# Altium PCB Front-End-Power-Protection.PcbDoc
Units mm, origin at the board's own origin, x right, y up, seen from the top; angles counter-clockwise.
Board outline 73.5 x 29.5 mm, 2 copper layers (Top Layer, Bottom Layer); 20 components, 11 nets, 49 pads, 5 vias.
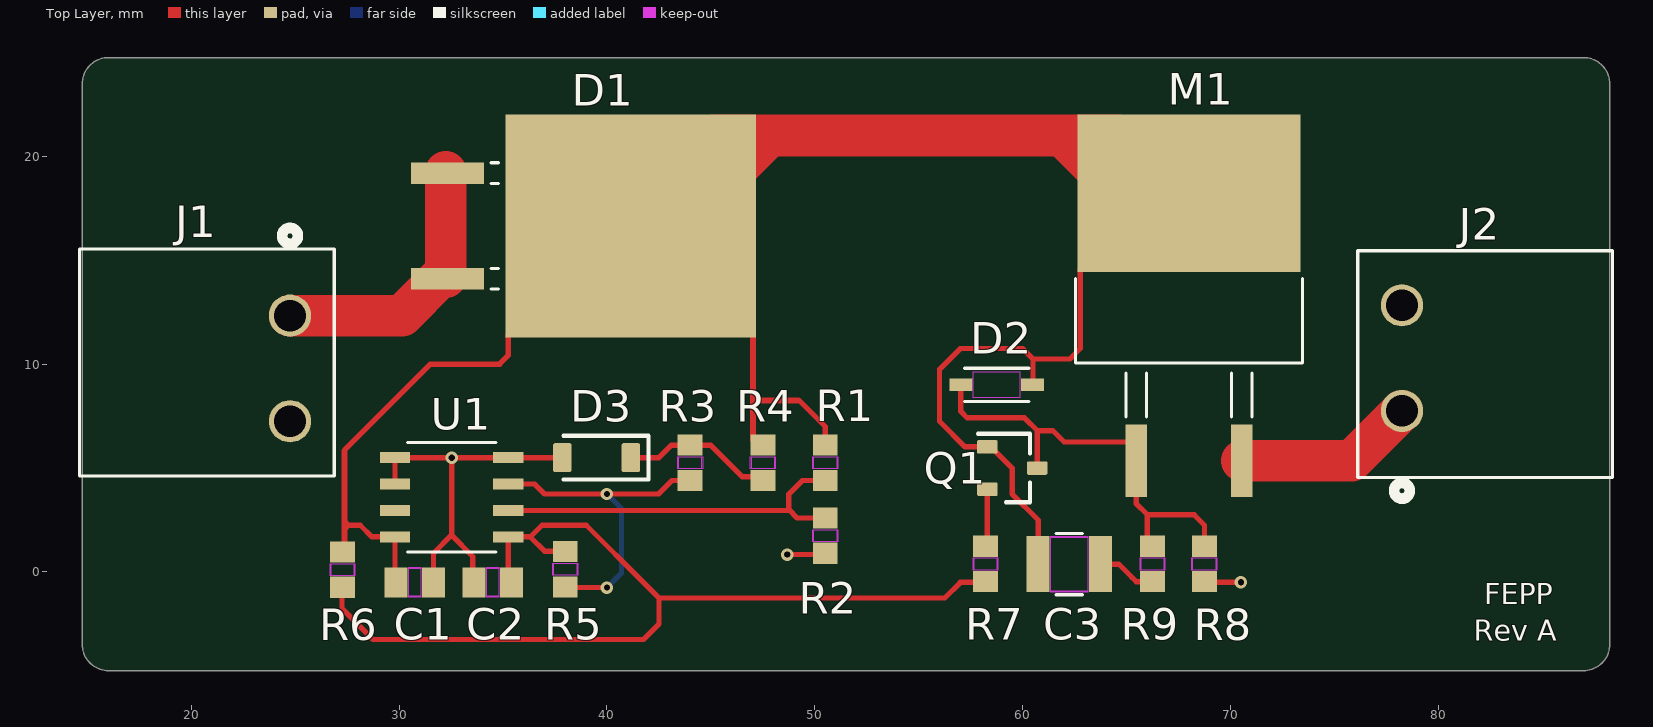
[diagram p0: Top Layer view]
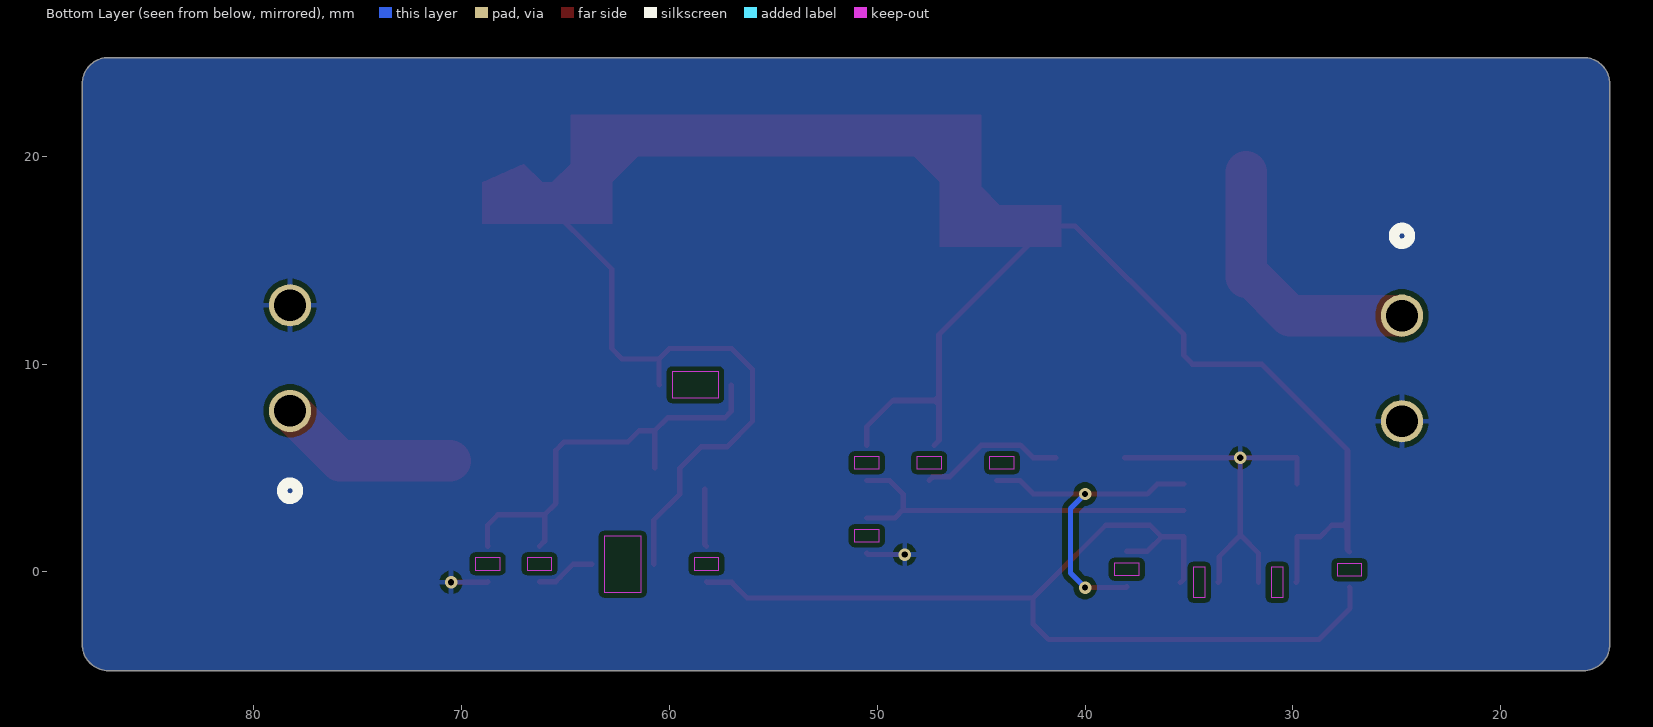
[diagram p1: Bottom Layer view, seen from below]
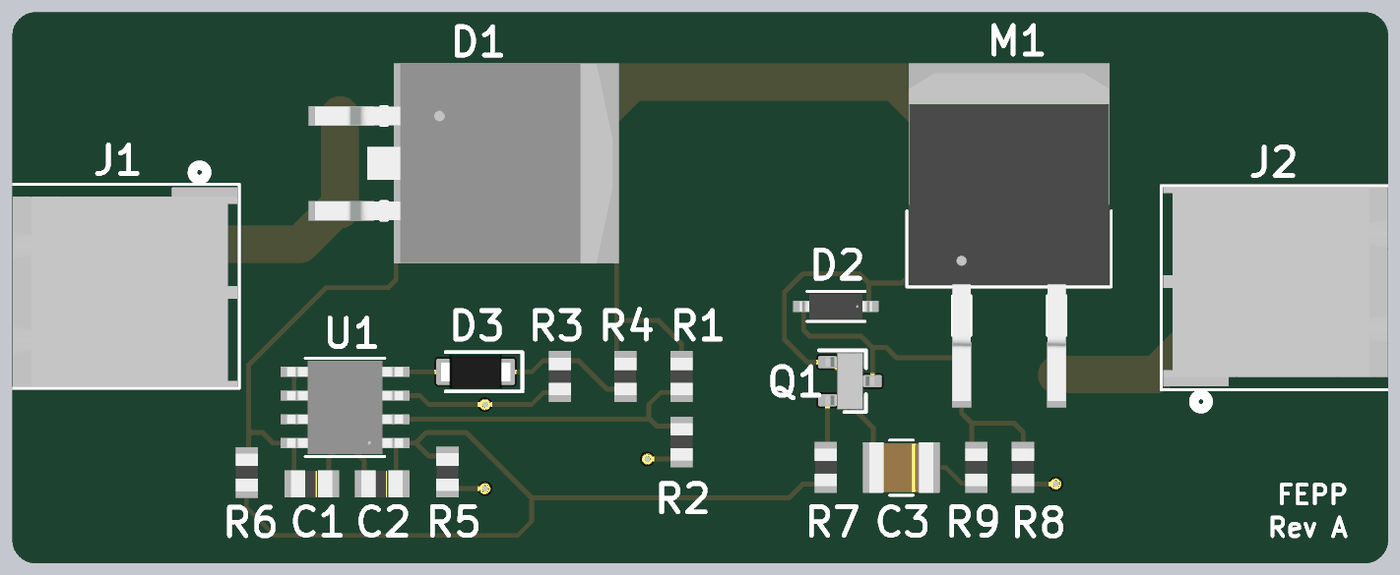
[diagram p2: 3D render of the assembled board from above, using the file's embedded part models]

## Layer stack, top to bottom
Top Solder: solder mask 0.0102, Solder Resist, Dk 3.5
Top Layer: signal copper 0.0356
Dielectric 1: dielectric 0.32, FR-4, Dk 4.8
Bottom Layer: signal copper 0.0356
Bottom Solder: solder mask 0.0102, Solder Resist, Dk 3.5

## Board outline
14.75,-3.48 14.75,23.48 cw(c16.02,23.48) 16.02,24.75 86.98,24.75 cw(c86.98,23.48) 88.25,23.48 88.25,-3.48 cw(c86.98,-3.48) 86.98,-4.75 16.02,-4.75 cw(c16.02,-3.48)

## Design rules (kind name [scope] priority, off if disabled: settings)
Clearance [All] p1: gap=0.254 ignorepadtopadclearanceinfootprint=FALSE except(0: Arc-Hole Track-Hole SMDPad-Hole THPad-Hole Via-Hole Fill-Hole Poly-Hole Region-Hole Text-Hole)
PolygonConnect [All] p1: connectstyle=Relief reliefconductorwidth=0.254 reliefentries=4 polygonreliefangle="90 Angle" airgapwidth=0.254
RoutingVias [All] p1: holewidth=0.3 width=0.6 viastyle="Through Hole" minholewidth=0.3 minwidth=0.6 maxholewidth=0.3 maxwidth=0.6
SolderMaskExpansion [All] p1: expansion=0.102 istentingtop=FALSE
Width "Power path" [InNet('NetD1_1') OR InNet('VIN_PROT') OR InNet('NetJ2_1')] p1: maxlimit=3 minlimit=1.5 preferedwidth=2
Width [All] p2: maxlimit=0.5 minlimit=0.2 preferedwidth=0.254
30 further rules are at their usual default settings.

## Components (designator, comment, footprint, x,y, rotation, side; value= is the part's Value field where it differs from the comment)
C1 "100nF" CAP_X7R_0805_AVX 30.75,-0.5 r180 top
C2 "100pF" CAP_X7R_0805_AVX 34.5,-0.5 r180 top
C3 "4.7uF" CAP_CC1210_YAG 62.24,0.372 r180 top
D1 "MBRB745" D2PAK_VIS 41.139,16.65 r270 top
D2 "MMSZ5245B" SOD123_DIO 58.75,9 r180 top
D3 "MM1Z4733A" SOD-123FL 39.5,5.5 r180 top value=CLD-Diode
J1 "282814-2" CONN2_282814-2 24.75,12.33 r270 top
J2 "282814-2" CONN2_282814-2 78.25,7.75 r90 top
M1 "IRF4905STRLPBF" TRAN_IRF4905STRLPBF_INF 68,15 r0 top
Q1 "MMBT3906" SOT-23 59.5,5 r0 top value=Diode
R1 "22k" RC0805N_YAG 50.5,5.25 r270 top
R2 "13k" RC0805N_YAG 50.5,1.75 r270 top
R3 "10k" RC0805N_YAG 44,5.25 r90 top
R4 "1k" RC0805N_YAG 47.5,5.25 r270 top
R5 "600k" RC0805N_YAG 37.993,0.135 r270 top
R6 "10k" RC0805N_YAG 27.277,0.114 r270 top
R7 "4.7k" RC0805N_YAG 58.211,0.385 r90 top
R8 "36k" RC0805N_YAG 68.741,0.385 r270 top
R9 "10k" RC0805N_YAG 66.246,0.385 r90 top
U1 "LM393D" SO8_STM 32.526,3.595 r180 top

## Footprints (in the part's own frame and the unit in brackets; to place one, negate y for a bottom-side part, rotate by r counter-clockwise, add the part's x,y. Pads: shape width x height; smd on the part's side, far side on the other; paste and mask are expansions set on the pad)
CAP_CC1210_YAG [mil]
  rect 44x106 smd paste+0 mask+0: 1(-59,0) 2(59,0)
  Top Layer keep-out region: -35,-51 -35,51 35,51 35,-51
  Keep-Out Layer region: -35,-53 -35,53 35,53 35,-53
  silkscreen extent -25,-58 25,58, body extent -67,-53 67,53, height 106
CAP_X7R_0805_AVX [mil]
  rect 44x57 smd paste+0 mask+0: 1(-35.5,0) 2(35.5,0)
  Top Layer keep-out region: -11.5,-26.5 -11.5,26.5 11.5,26.5 11.5,-26.5
  Keep-Out Layer region: -11.5,-28.5 -11.5,28.5 11.5,28.5 11.5,-28.5
  body extent -44,-29 44,29, height 37
CONN2_282814-2 [mil]
  round 80 hole 60 paste-40 mask+0: 1(0,0) 2(200,0)
  silkscreen extent -166,-399 303,84, body extent -119,-393 300,79, height 329
D2PAK_VIS [mil]
  rect 41x138 smd paste+0 mask+0: 1(-100,-347) 3(100,-347)
  rect 422x474 smd paste+0 mask+0: 2(0,0)
  silkscreen extent -119,-264 120,-250, body extent -210,-402 210,223, height 190
RC0805N_YAG [mil]
  rect 40x47 smd paste+0 mask+0: 1(-33.5,0) 2(33.5,0)
  Top Layer keep-out region: -11.5,-21.5 -11.5,21.5 11.5,21.5 11.5,-21.5
  Keep-Out Layer region: -11.5,-23.5 -11.5,23.5 11.5,23.5 11.5,-23.5
  body extent -39,-24 39,24, height 28
SO8_STM [mil]
  rect 57.5x21 smd paste+0 mask+0: 1(-107.25,75) 2(-107.25,25) 3(-107.25,-25) 4(-107.25,-75) 5(107.25,-75) 6(107.25,-25) 7(107.25,25) 8(107.25,75)
  silkscreen extent -84,-104 84,104, body extent -122,-99 122,99, height 69
SOD123_DIO [mm]
  rect 1.111x0.601 smd paste+0 mask+0: 1(-1.725,0) 2(1.725,0)
  Keep-Out Layer region: -1.119,-0.624 -1.119,0.624 1.119,0.624 1.119,-0.624
  silkscreen extent -1.55,-0.8 1.55,0.8, body extent -1.92,-0.67 1.92,0.67, height 0.81
SOD-123FL [mm]
  rrect25% 0.9x1.4 smd: A(1.65,0) K(-1.65,0)
  silkscreen extent -2.5,-1.05 1.6,1.05, body extent -1.85,-0.9 1.85,0.9, height 1.3
SOT-23 [mm] "SOT23, 3-Leads, IPC Medium Density, TO-236"
  rrect25% 1x0.65 smd: 1(-1.2,1.02) 2(-1.2,-1.02) 3(1.2,0)
  silkscreen extent -1.65,-1.65 0.85,1.65, body extent -1.3,-1.52 1.3,1.52, height 1.3
TRAN_IRF4905STRLPBF_INF [mil]
  rect 41x138 smd paste+0 mask+0: 1(-100,-380) 2(100,-380)
  rect 422x298 smd paste+0 mask+0: 3(0,127)
  silkscreen extent -215,-297 215,-34, body extent -210,-435 210,255, height 67

## Part data
C1: library part 08053C104KAT2A, "08053C104KAT2A", Manufacturer_Name="KYOCERA AVX", Copyright="Copyright (C) 2026 Ultra Librarian. All rights reserved.", Manufacturer_Part_Number=08053C104KAT2A
C2: library part 08053C104KAT2A, Manufacturer_Name="KYOCERA AVX", Copyright="Copyright (C) 2026 Ultra Librarian. All rights reserved.", Manufacturer_Part_Number=08053C104KAT2A
C3: library part CC1210KKX7R9BB475, "CC1210KKX7R9BB475", Manufacturer_Name=Yageo, Copyright="Copyright (C) 2026 Ultra Librarian. All rights reserved.", Manufacturer_Part_Number=CC1210KKX7R9BB475
D1: "No Description Available", Manufacturer_Name=Vishay, Copyright="Copyright (C) 2026 Ultra Librarian. All rights reserved.", Manufacturer_Part_Number=MBRB745
D2: library part MMSZ5245B-7-F, "MMSZ5245B-7-F", Manufacturer_Name="Diodes Inc", Copyright="Copyright (C) 2026 Ultra Librarian. All rights reserved.", Manufacturer_Part_Number=MMSZ5245B-7-F
J1 J2: "TERMI-BLOK HEADER,ASSY90 2P.5", Manufacturer_Name="TE Connectivity", Copyright="Copyright (C) 2026 Ultra Librarian. All rights reserved.", Datasheet=https://www.te.com/commerce/DocumentDelivery/DDEController?Action=srchrtrv&DocNm=1-1773458-1_EURO_STYLE_QRG&DocType=Data+Sheet&DocLang=English&PartCntxt=282814-2&DocFormat=pdf, Manufacturer_Part_Number=282814-2, RefDes=RefDes, Type=Type
M1: "No Description Available", Manufacturer_Name=Infineon, Copyright="Copyright (C) 2026 Ultra Librarian. All rights reserved.", Datasheet=https://www.infineon.com/dgdl/irf4905spbf.pdf?fileId=5546d462533600a4015355e331c41980, Manufacturer_Part_Number=IRF4905STRLPBF, RefDes=RefDes, Type=Type
R1 R2 R3 R4 R5 R6 R7 R8 R9: library part RC0805FR-0722KL, "RC0805FR-0722KL", Manufacturer_Name=Yageo, Copyright="Copyright (C) 2026 Ultra Librarian. All rights reserved.", Digi-Key_Part_Number_1=311-22.0KCRCT-ND, Digi-Key_Part_Number_2=311-22.0KCRDKR-ND, Digi-Key_Part_Number_3=311-22.0KCRTR-ND, Digi-Key_Part_Number_4=311-22.0KCRTR-NDL, Manufacturer_Part_Number=RC0805FR-0722KL
U1: "Low power dual voltage comparator", Manufacturer_Name=STMicroelectronics, Copyright="Copyright (C) 2025 Ultra Librarian. All rights reserved.", Manufacturer_Part_Number=LM393D, RefDes=RefDes, Type=Type
D3: Datasheet=https://diotec.com/de/produktliste/C.html, ki_description="CLD Current Limiting Diode", ki_keywords="CLD current limiting diode", Reference=D
Q1: Datasheet=https://diotec.com/de/produktliste/D.html, ki_description="Diode with NC pin", ki_keywords="Doide NC pin", Reference=D

## Via types
v1: diameter 0.6, hole 0.3, Top Layer to Bottom Layer, 5 vias

## Nets (pads, with @x,y where several pads share a name; then routed paths per layer and width w, separated by ;. In a path a pad name is that pad's centre, name@x,y a point inside that pad or via, vN(x,y) a via of type N, cw(c..) or ccw(c..) an arc to the next point about the centre after c; other vN are vias at no path point)
GND: C1.1 C2.2 D3.A J1.2 J2.2 R2.2 R8.2 U1.4 U1.5 U1.6 | length 22.3
  Top Layer w0.254: U1.6 U1.5 v1(32.526,5.5) ; C1.1 31.652,0.902 32.526,1.776 v1(32.526,5.5) ; 32.52,1.77 33.544,0.746 33.544,-0.446 C2.2 ; D3.A@38.1,5.5 U1.4 v1(32.526,5.5) ; v1(48.677,0.835) 50.435,0.835 R2.2 ; R8.2 68.776,-0.5 v1(70.5,-0.5)
NetC3_1: C3.1 R9.1 | length 2.9
  Top Layer w0.254: C3.1 64.628,0.372 65.25,-0.25 65.466,-0.466 R9.1
NetD1_1: D1.1 D1.3 J1.1 | length 13.3
  Top Layer w2: J1.1 30.137,12.33 31.977,14.17 32.25,14.17 D1.1@32.25,19.25
NetD2_2: D2.2 M1.1 Q1.3 R8.1 R9.2 | length 21.2
  Top Layer w0.254: D2.2 57.025,7.725 57.335,7.415 60.085,7.415 60.7,6.8 ; Q1.3 60.7,6.8 ; R9.2 66,1.482 66,2.75 ; R8.1 68.75,1.245 68.75,2.25 68.25,2.75 66,2.75 ; 60.7,6.8 61.45,6.8 62,6.25 65.066,6.25 65.46,5.856 M1.1 65.46,3.29 66,2.75
NetD3_K: D3.K R3.2 R4.2 | length 7.1
  Top Layer w0.254: D3.K@41.4,5.5 42.5,5.5 43.101,6.101 R3.2 44.988,6.101 46.512,4.577 47.322,4.577 R4.2
NetJ2_1: J2.1 M1.2 | length 8.7
  Top Layer w2: M1.2 75.839,5.348 78.241,7.75 J2.1
NetQ1_2: Q1.2 R7.2 | length 2.8
  Top Layer w0.254: R7.2 58.3,1.326 Q1.2
NetR1_2: R1.2 R2.1 U1.2 | length 18.2
  Top Layer w0.254: U1.2 48.71,2.96 48.75,3 ; R2.1 49.149,2.601 48.75,3 ; R1.2 49.399,4.399 48.75,3.75 48.75,3
NetR3_1: R3.1 R5.2 U1.3 | length 16.6
  Top Layer w0.254: U1.3 36.52,4.23 37,3.75 42.485,3.75 43.134,4.399 R3.1@44.25,4.399 ; R5.2 38.027,-0.75 v1(40,-0.75)
  Bottom Layer w0.254: v1(40,-0.75) 40.696,-0.054 40.696,3.054 v1(40,3.75)
OUT1: C2.1 R5.1 R6.2 R7.1 U1.1 | length 47.7
  Top Layer w0.254: R6.2 27.25,-0.764 27.25,-1.75 28.75,-3.25 41.75,-3.25 42.5,-2.5 42.5,-1.25 ; C2.1@35.411,-0.51 C2.1 35.25,-0.348 U1.1 36.31,1.69 ; R5.1 37.979,1 37,1 36.31,1.69 ; R7.1 58.176,-0.5 57,-0.5 56.25,-1.25 42.5,-1.25 ; 36.31,1.69 36.87,2.25 39,2.25 41.75,-0.5 42.5,-1.25
VIN_PROT: C1.2 C3.2 D1.2 D2.1 M1.3 Q1.1 R1.1 R4.1 R6.1 U1.8 | length 66.4
  Top Layer w0.254: R6.1 R6.1@27.366,1.054 ; 27.366,5.866 31.5,10 34.836,10 35.246,10.41 35.246,11.418 40.479,16.65 D1.2 41.799,16.65 D1.2@47.032,11.418 ; 28.13,2.25 28.69,1.69 U1.8 29.802,-0.453 C1.2 ; R4.1@47.032,6.319 R4.1@47.268,6.083 ; 49.25,8.25 50.5,7 R1.1 ; D2.1 60.5,9.025 60.5,10.25 ; C3.2@60.742,1.16 C3.2 60.75,0.381 60.75,2.5 59.495,3.755 59.495,5 58.475,6.02 Q1.1 57.23,6.02 56,7.25 56,9.75 57,10.75 60,10.75 60.5,10.25 ; M1.3 66.43,18.226 62.773,14.568 62.773,10.75 62.273,10.25 60.5,10.25
pads on no net: U1.7

## Polygon pours and split planes (outlines as drawn)
GND on Bottom Layer "GND_L02_P000" (solid, pour order 0): 14.75,-3.48 14.75,23.48 cw(c16.02,23.48) 16.02,24.75 86.98,24.75 cw(c86.98,23.48) 88.25,23.48 88.25,-3.48 cw(c86.98,-3.48) 86.98,-4.75 16.02,-4.75 cw(c16.02,-3.48)

## Other copper
Top Layer:
  region net VIN_PROT: 47.159,8.491 47.273,8.377 49.25,8.377 49.25,8.123 47.273,8.123 47.159,8.009 47.159,6.319 46.905,6.319 46.905,8.123 46.905,8.377 46.905,11.418 47.159,11.418
  region net VIN_PROT: 27.493,2.491 27.607,2.377 28.13,2.377 28.13,2.123 27.607,2.123 27.493,2.009 27.493,1.054 27.239,1.054 27.239,2.123 27.239,2.377 27.239,5.866 27.493,5.866
  region net VIN_PROT: 64.75,21 64.75,19.65 65.65,18.75 66.1,18.75 67,19.65 69,18.75 69,18.226 69,16.75 68.9,16.75 68,16.75 63.275,16.75 62.75,16.75 62.75,18.75 61.5,20 48.25,20 47,18.75 47,15.65 45,15.65 41.139,15.65 41.139,17.65 44.1,17.65 45,18.55 45,22 64.75,22

## Silkscreen, mask and mechanical layers (free items; w line width, h text height)
Top Overlay:
  text "FEPP" at 82.2,-1.55 h1
  text "Rev A" at 81.7,-3.3 h1
Mechanical 1:
  lines w0.254: 14.75,-3.48 ccw(c16.02,-3.48) 16.02,-4.75 86.98,-4.75 ccw(c86.98,-3.48) 88.25,-3.48 88.25,23.48 ccw(c86.98,23.48) 86.98,24.75 25.25,24.75 16.02,24.75 ccw(c16.02,23.48) 14.75,23.48 14.75,-3.48

## Text inside footprints (layer, text, board x,y; h text height)
D1: Mechanical 13 "*" at 35.094,19.508 h1.27 r270
D2: Mechanical 13 "*" at 60.239,9.635 h1.27 r180
M1: Mechanical 13 "*" at 65.143,9.793 h1.27
U1: Mechanical 13 "*" at 34.456,2.439 h1.27 r180; Mechanical 13 "RefDes2" at 34.748,4.23 h1.27 r180